# EAGLE board VCPmonitor (EAGLE 5.12)
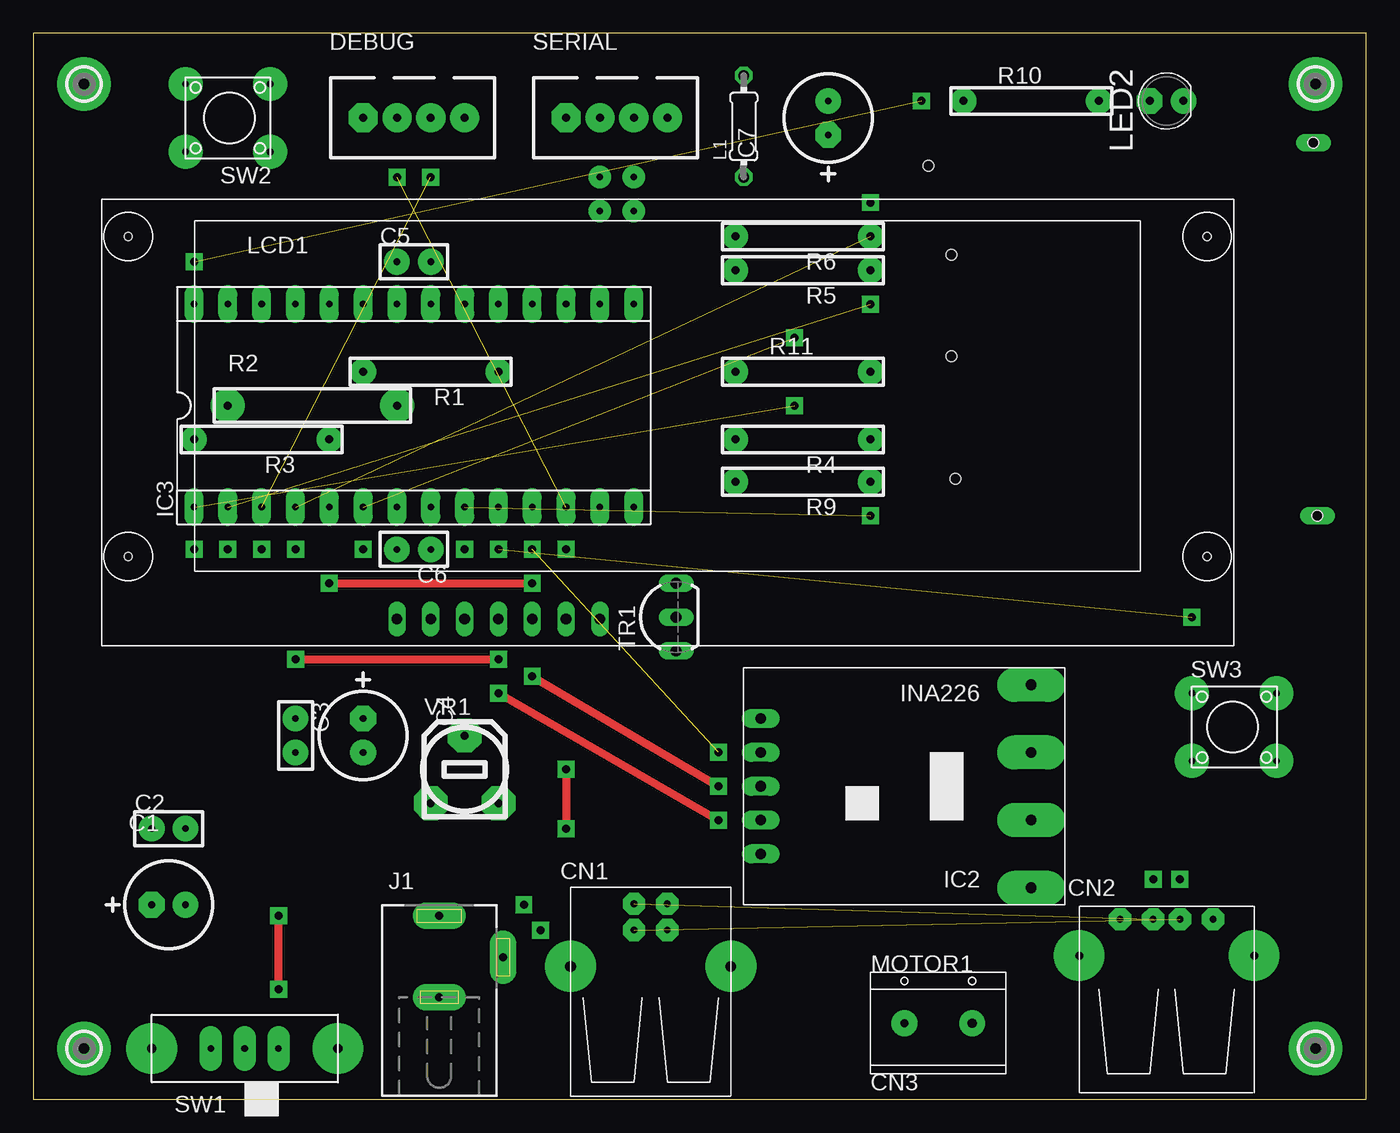
[diagram p0: board, top side]
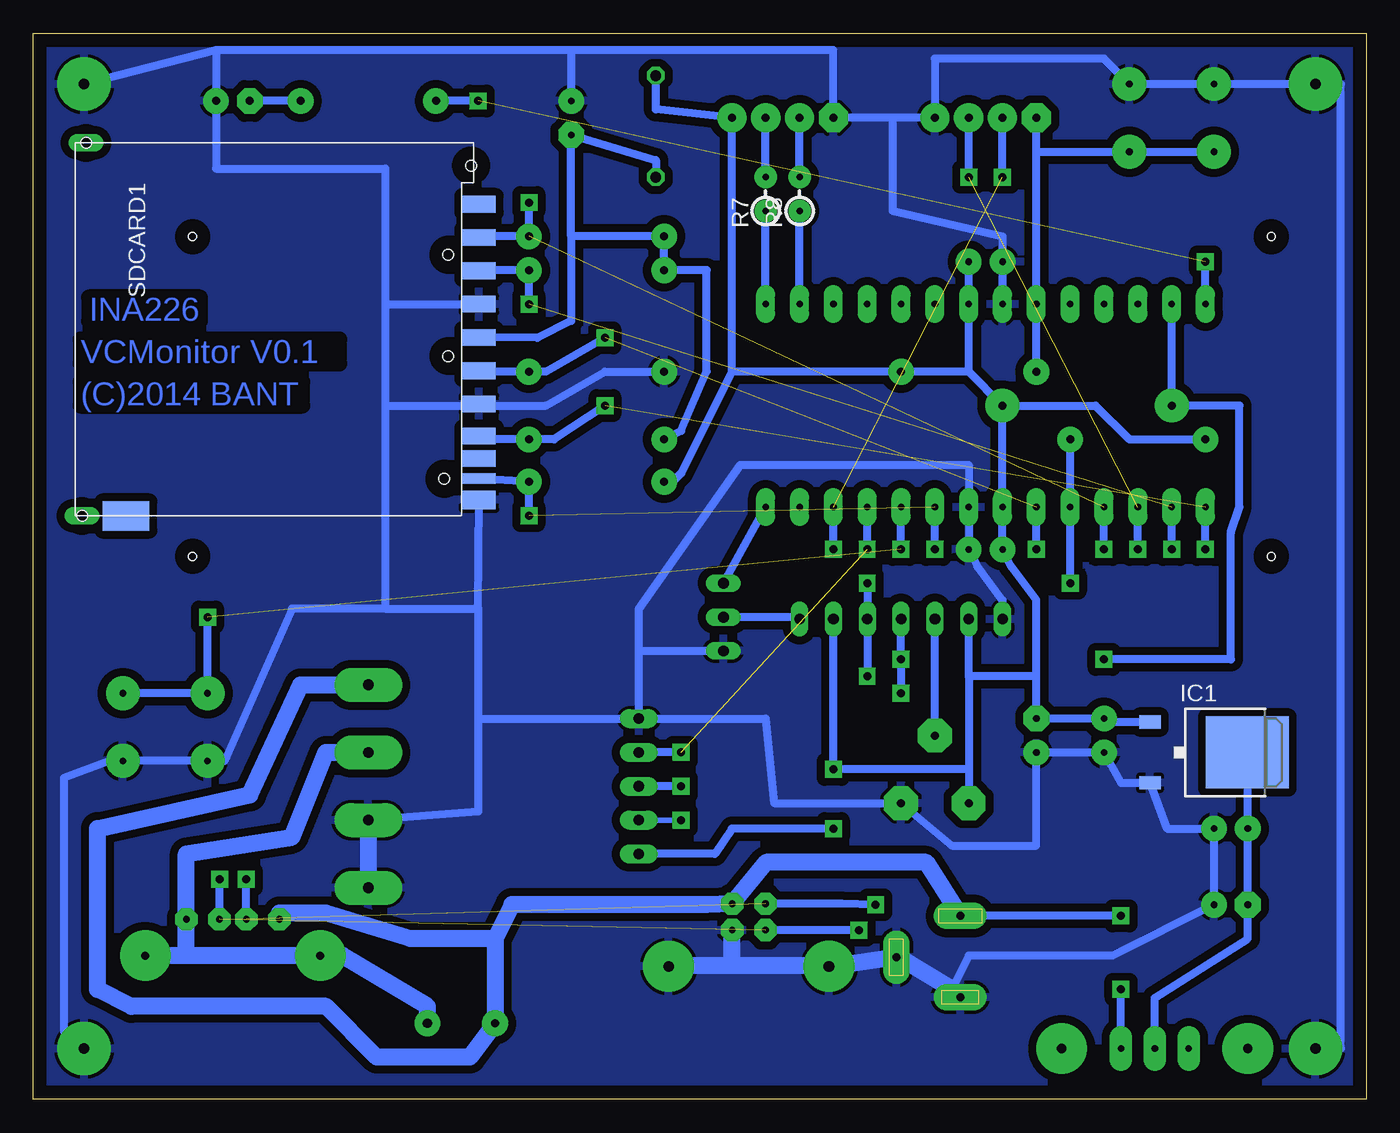
[diagram p1: board, bottom side, seen from below]

Size 100.08 x 80.01 mm. Coordinates in mm from the lower left corner, seen from the top.
Outline: 0,0 100.08,0 100.08,80.01 0,80.01 0,0
Copper layers (1*16): Top 0.035mm / dielectric 1.5mm / Bottom 0.035mm
Design rules "default": minimum track width 10mil, minimum drill 24mil, track to track 8mil, track to pad 8mil, pad to pad 8mil, via to via 8mil, smd to smd 8mil, copper to edge 40mil, drill to drill 8mil, minimum pad ring 10mil, minimum via ring 8mil, stop-mask expansion 4mil, vias tented up to drill 0mil, thermal gap 10mil

## Footprints (pad centres in the part's own frame; a part is rotated, then mirrored left to right if it is on the bottom)
CCAP_6.5 = drill 0.5 pad 1.93 octagon: + -1.27,0 | drill 0.5 pad 1.93 round: - 1.27,0
CAP_DIP_1 = drill 0.5 pad 1.93 round: 1 -1.27,0; 2 1.27,0
USB-B-H = drill 0.5 pad 1.676 octagon: D+ 0,1.25; D- 1.981,1.25; GND 0,-1.25; VBUS 1.981,-1.25 | drill 0.8 pad 3.81 round: F1 -2.718,6.02; F2 -2.718,-6.02
USB-A-H = drill 0.5 pad 1.676 octagon: D+ 2.718,-1.003; D- 2.718,1.003; GND 2.718,-3.493; VBUS 2.718,3.493 | drill 0.6 pad 3.81 round: P$5 0,-6.566; P$6 0,6.566
TERMINAL = drill 0.6 pad 1.93 round: P$1 -2.54,0 | drill 0.7 pad 1.93 round: P$2 2.54,0
CON_HRS_DIP_4 = drill 0.6 pad 2.184 octagon: 1 -3.81,0 | drill 0.6 pad 2.184 round: 2 -1.27,0; 3 1.27,0; 4 3.81,0
TO252 = smd 1 x 1.6: 1 -2.28,-4.8; 2 2.28,-4.8 | smd 5.4 x 6.2: 3 0,2.5
INA226 = drill 0.8 pad 1.422 long: AL 10.16,-2.54; GND 10.16,-5.08; SCL 10.16,2.54; SDA 10.16,0; VS 10.16,5.08 | drill 0.8 pad 2.54 long: ISENSE+ -10.16,-2.54; ISENSE- -10.16,2.54; V+ -10.16,-7.62; V- -10.16,7.62
DIL28 = drill 0.5 pad 1.422 long: 1 -15.24,-7.62; 2 -12.7,-7.62; 3 -10.16,-7.62; 4 -7.62,-7.62; 5 -5.08,-7.62; 6 -2.54,-7.62; 7 0,-7.62; 8 2.54,-7.62; 9 5.08,-7.62; 10 7.62,-7.62; 11 10.16,-7.62; 12 12.7,-7.62; 13 15.24,-7.62; 14 17.78,-7.62; 15 17.78,7.62; 16 15.24,7.62; 17 12.7,7.62; 18 10.16,7.62; 19 7.62,7.62; 20 5.08,7.62; 21 2.54,7.62; 22 0,7.62; 23 -2.54,7.62; 24 -5.08,7.62; 25 -7.62,7.62; 26 -10.16,7.62; 27 -12.7,7.62; 28 -15.24,7.62
DCJ0202 = drill 0.6 pad 2 long: 1 0,6.148; 2 4.8,3.048; 3 0,0.048
0204/7 = drill 0.813 octagon: 1 -3.81,0; 2 3.81,0
ACM1602 = drill 0.8 long: 1 -20.32,-14.75; 2 -17.78,-14.75; 3 -15.24,-14.75; 4 -12.7,-14.75; 5 -10.16,-14.75; 6 -7.62,-14.75; 7 -5.08,-14.75 | hole 0.6: -40.5,13.95; -40.5,-10.05; 40.5,13.95; 40.5,-10.05
LED_3MM_VIRT_2 = drill 0.6 pad 1.93 octagon: A 0,1.27 | drill 0.6 pad 1.93 round: K 0,-1.27
PAD-2.1 = drill 0.8 pad 4 round: B2,1 0,0
R_0.125W_4 = drill 0.6 pad 1.93 round: 1 -5.08,0; 2 5.08,0
R_0.25W_5 = drill 0.6 pad 2.54 round: 1 -6.35,0; 2 6.35,0
R_0.125W_1 = drill 0.5 pad 1.676 round: 1 -1.27,0; 2 1.27,0
DM1B-DSF-PEJ = smd 1.25 x 2.5: 1 -6.9,15.3; 2 -4.4,15.3; 3 -1.9,15.3; 4 0.6,15.3; 5 3.1,15.3; 6 5.6,15.3; 7 8,15.3; 8 9.7,15.3; 9 -9.4,15.3 | smd 1.4 x 2.5: COM 12.8,15.3 | smd 0.8 x 2.5: DET 11.2,15.3 | drill 0.8 pad 1.2 long: P$17 14,-14.5 | drill 0.8 pad 1.27 long: P$18 -14,-14.2 | smd 2.2 x 3.5: WP 14,-11.2 | hole 0.8: -12.3,14.7; -5.6,13; 2,13; 11.2,12.7; -14,-14.2; 14,-14.5
DS-3-SIDE = drill 0.5 pad 1.676 long: 1 0,-2.54; 2 0,0; 3 0,2.54 | drill 0.7 pad 3.81 round: P$1 0,6.985; P$2 0,-6.985
B3F-10X = drill 0.5 pad 2.54 round: 1 -1.27,2.54; 2 5.08,2.54; 3 -1.27,-2.54; 4 5.08,-2.54
TO92 = drill 0.813 long: B 2.54,0; C 0,0; E -2.54,0
POT_MIDDLE = drill 0.6 pad 2.54 octagon: A -2.54,-2.54; E 2.54,-2.54; S 0,2.54

## Placement (x,y rotation side)
C1  4.7uF  [CCAP_6.5]  10.16,14.61 0 top
C2  0.1uF  [CAP_DIP_1]  10.16,20.32 0 top
C3  0.1uF  [CAP_DIP_1]  19.68,27.3 270 top
C4  4.7uF  [CCAP_6.5]  24.77,27.3 270 top
C5  0.1u  [CAP_DIP_1]  28.57,62.87 0 top
C6  0.1u  [CAP_DIP_1]  28.57,41.27 180 top
C7  4.7u  [CCAP_6.5]  59.69,73.66 90 top
CN1  USB-B-H(IN)  [USB-B-H]  46.35,12.7 90 top
CN2  USB-A-H(OUT)  [USB-A-H]  85.09,10.79 90 top
CN3  MOTOR1  [TERMINAL]  67.94,5.71 0 top
DEBUG  [CON_HRS_DIP_4]  28.57,73.66 0 top
IC1  NJU7223DL1-33  [TO252]  11.43,26.04 270 bottom
IC2  INA226  [INA226]  64.77,23.5 180 top
IC3  LPC1114FN28  [DIL28]  27.3,52.07 0 top
J1  DC_JACK  [DCJ0202]  30.48,7.62 0 top
L1  10uH  [0204/7]  53.34,73.03 90 top
LCD1  AE-ACM1602  [ACM1602]  47.62,50.8 0 top
LED2  LED  [LED_3MM_VIRT_2]  85.09,74.93 90 top
MT1  MOUNT-PAD2.1  [PAD-2.1]  96.27,3.81 0 top
MT2  MOUNT-PAD2.1  [PAD-2.1]  3.81,3.81 0 top
MT3  MOUNT-PAD2.1  [PAD-2.1]  96.27,76.2 0 top
MT4  MOUNT-PAD2.1  [PAD-2.1]  3.81,76.2 90 top
R1  10K  [R_0.125W_4]  29.84,54.61 180 top
R2  4.7K  [R_0.25W_5]  20.95,52.07 0 top
R3  4.7K  [R_0.125W_4]  17.14,49.53 180 top
R4  47K  [R_0.125W_4]  57.78,49.53 180 top
R5  47K  [R_0.125W_4]  57.78,62.23 180 top
R6  47K  [R_0.125W_4]  57.78,64.77 180 top
R7  1K  [R_0.125W_1]  45.09,67.94 90 bottom
R8  1K  [R_0.125W_1]  42.55,67.94 90 bottom
R9  1M  [R_0.125W_4]  57.78,46.35 180 top
R10  1K  [R_0.125W_4]  74.93,74.93 0 top
R11  47K  [R_0.125W_4]  57.78,54.61 0 top
SDCARD1  DM1B-DSF-PEJ  [DM1B-DSF-PEJ]  81.92,57.78 270 bottom
SERIAL  [CON_HRS_DIP_4]  43.81,73.66 0 top
SW1  SLIDESW-3  [DS-3-SIDE]  15.88,3.81 90 top
SW2  TACT-SW  [B3F-10X]  16.51,73.66 180 top
SW3  TACT-SW  [B3F-10X]  88.27,27.94 0 top
TR1  DTC124ES  [TO92]  48.26,36.2 90 top
VR1  10K  [POT_MIDDLE]  32.38,24.77 0 top

## Library data of the parts
C1-C7 DEBUG J1 LED2 MT1-MT4 R1-R11 SERIAL SW1-SW3 VR1 = MyLib
CN1 CN2 = con-usb2
CN3 IC1 IC3 TR1 = bant
IC2 = bant2
L1 = rcl
LCD1 = akizuki
SDCARD1 = sd-card

## Nets
3.3V: C3.1 C4.+ C5.2 C6.2 IC1.1 IC2.VS IC3.7 IC3.21 L1.2 LCD1.2 LCD1.6 R1.1 R2.2 R3.2 R9.2 SERIAL.4 VR1.A
DP1(MISO): IC3.1 R4.1 SDCARD1.7
DP2(MOSI): IC3.2 R5.1 SDCARD1.2
DP4(!CS): IC3.4 R6.1 SDCARD1.1
DP5(SDA): IC2.SDA IC3.5 LCD1.5 R3.1
DP6(SCK): IC3.6 R11.2 SDCARD1.5
DP9(DETECT): IC3.9 R9.1 SDCARD1.DET
DP10(SW): IC3.10 SW3.1 SW3.2
DP11(AL): IC2.AL IC3.11
DP13: IC3.13
DP14(LED1): IC3.14 TR1.B
DP15(RX): IC3.15 R7.1
DP16(TX): IC3.16 R8.1
DP17: IC3.17
DP18: IC3.18
DP23(!RESET): DEBUG.1 IC3.23 R1.2 SW2.1 SW2.2
DP24(ISP): IC3.24
DP25: IC3.25
DP26: IC3.26
DP27(SCL): IC2.SCL IC3.27 LCD1.4 R2.1
DP28(LED2): IC3.28 R10.1
GND: C1.- C2.2 C3.2 C4.- C5.1 C6.1 C7.- CN1.F1 CN1.F2 CN1.GND DEBUG.4 IC1.2 IC2.GND IC2.ISENSE- IC2.V- IC3.8 IC3.22 J1.2 J1.3 LCD1.1 LED2.K MT1.B2,1 MT2.B2,1 MT3.B2,1 MT4.B2,1 R11.1 SDCARD1.3 SDCARD1.6 SDCARD1.COM SERIAL.1 SW2.3 SW2.4 SW3.3 SW3.4 TR1.E VR1.E
N$1: C1.+ C2.1 IC1.3 SW1.2
N$2: R7.2 SERIAL.3
N$4: LED2.A R10.2
N$5: R8.2 SERIAL.2
N$6: C7.+ L1.1 R4.2 R5.2 R6.2 SDCARD1.4
N$7: LCD1.3 VR1.S
N$8: CN1.D- CN2.D-
N$9: CN1.D+ CN2.D+
N$10: LCD1.7 TR1.C
SWCLK: DEBUG.3 IC3.3
SWDIO: DEBUG.2 IC3.12
VDD: CN1.VBUS CN2.VBUS CN3.P$1 IC2.V+ J1.1 SW1.1
VSS: CN2.GND CN2.P$5 CN2.P$6 CN3.P$2 IC2.ISENSE+
XTALIN: IC3.20
XTALOUT: IC3.19

## Tracks (layer width: path | path; a pad name or v marks a point on that pad's centre or on a via)
3.3V  (via drill 0.6 pad 1.27)
  Top 0.61: v40.01,24.77 v40.01,20.32
  Bottom 0.254: IC1.1 16.51,27.94
  Bottom 0.61: IC1.1 19.68,28.32 C3.1 C4.+ 24.77,31.75 | C5.2 IC3.21 29.84,54.61 | R3.2 17.78,49.53 20.32,52.07 R2.2 | 29.84,54.61 R1.1 47.62,54.61 | R2.2 29.84,54.61 | 47.62,54.61 51.44,46.99 52.07,46.35 R9.2 | 47.62,54.61 SERIAL.4 53.34,74.3 L1.2 | R2.2 IC3.7 C6.2 26.67,40.01 24.77,37.47 24.77,31.75 | 29.84,24.77 v40.01,24.77 LCD1.6 | 29.84,31.75 29.84,24.77 | 29.84,31.75 LCD1.2 | v40.01,20.32 47.62,20.32 48.9,18.41 IC2.VS | 29.84,24.77 VR1.A | 24.77,31.75 29.84,31.75
DP1(MISO)  (via drill 0.6 pad 1.27)  (1 unrouted)
  Bottom 0.61: SDCARD1.7 66.04,49.53 R4.1 60.96,49.53 v57.15,52.07 | v12.06,41.27 IC3.1
DP2(MOSI)  (via drill 0.6 pad 1.27)  (1 unrouted)
  Bottom 0.61: SDCARD1.2 66.04,62.23 R5.1 v62.87,59.69 | v14.61,41.27 IC3.2
DP4(!CS)  (via drill 0.6 pad 1.27)  (1 unrouted)
  Bottom 0.61: SDCARD1.1 66.04,64.77 R6.1 v62.87,67.31 | v19.68,41.27 IC3.4
DP5(SDA)  (via drill 0.6 pad 1.27)
  Top 0.61: v22.23,38.73 v37.47,38.73 | v37.47,31.75 v51.44,23.5
  Bottom 0.61: R3.1 IC3.5 v22.23,38.73 | v51.44,23.5 IC2.SDA | v37.47,31.75 LCD1.5 v37.47,38.73
DP6(SCK)  (via drill 0.6 pad 1.27)  (1 unrouted)
  Bottom 0.254: 66.67,54.61 SDCARD1.5
  Bottom 0.61: 66.67,54.61 R11.2 61.59,54.61 v57.15,57.15 | v24.77,41.27 IC3.6
DP9(DETECT)  (via drill 0.6 pad 1.27)  (1 unrouted)
  Bottom 0.61: SDCARD1.DET R9.1 v62.87,43.81 | v32.38,41.27 IC3.9
DP10(SW)  (via drill 0.6 pad 1.27)  (1 unrouted)
  Bottom 0.61: SW3.2 SW3.1 87,31.11 v87,36.2 | v34.92,41.27 IC3.10
DP11(AL)  (via drill 0.6 pad 1.27)  (1 unrouted)
  Bottom 0.61: v51.44,26.04 IC2.AL | v37.47,41.27 IC3.11
DP14(LED1)
  Bottom 0.61: TR1.B IC3.14
DP15(RX)
  Bottom 0.61: IC3.15 R7.1
DP16(TX)
  Bottom 0.61: IC3.16 R8.1
DP23(!RESET)
  Bottom 0.61: R1.2 IC3.23 24.77,71.12 | SW2.2 SW2.1 24.77,71.12 | 24.77,71.12 DEBUG.1
DP27(SCL)  (via drill 0.6 pad 1.27)
  Top 0.61: v19.68,33.02 v34.92,33.02 | v34.92,30.48 v51.44,20.95
  Bottom 0.406: v51.44,20.95 IC2.SCL
  Bottom 0.61: IC3.27 R2.1 9.53,52.07 9.53,44.45 10.16,42.55 10.16,33.02 v19.68,33.02 | LCD1.4 v34.92,33.02 v34.92,30.48
DP28(LED2)  (via drill 0.6 pad 1.27)  (1 unrouted)
  Bottom 0.61: IC3.28 v12.06,62.87 | v66.67,74.93 R10.1
GND
  Bottom 0.254: J1.3 31.75,7.62 | 67.31,52.07 SDCARD1.6
  Bottom 0.61: 31.11,8.26 29.84,10.79 19.05,10.79 C1.- C2.2 14.96,20.32 IC1.2 18.41,23.75 C3.2 C4.- 24.77,19.05 31.11,19.05 VR1.E 44.45,22.23 45.09,28.57 IC2.GND | MT4.B2,1 3.81,74.93 | IC3.22 C5.1 27.3,64.77 35.56,66.67 35.56,73.66 | 35.56,73.66 SERIAL.1 40.01,78.74 59.69,78.74 | 35.56,73.66 DEBUG.4 32.38,78.11 19.68,78.11 SW2.3 SW2.4 MT4.B2,1 | 66.61,52.07 61.59,52.07 57.15,54.61 R11.1 | 66.67,36.83 SDCARD1.COM 66.67,44.98 | 54.61,33.66 54.61,36.83 46.99,47.62 29.84,47.62 IC3.8 C6.1 29.21,40.01 27.3,37.47 LCD1.1 | 54.61,33.66 TR1.E | MT4.B2,1 3.17,76.2 | 59.69,78.74 86.36,78.74 | 86.36,78.74 LED2.K | 59.69,78.74 C7.- | IC2.GND 54.61,33.66 | MT2.B2,1 1.91,3.81 1.91,76.2 MT4.B2,1 | 86.36,78.74 MT3.B2,1 | MT1.B2,1 97.79,5.08 97.79,24.13 94.36,25.4 SW3.4 SW3.3 85.72,25.4 80.64,36.83 73.66,36.83 | 66.67,36.83 66.67,28.57 | 66.67,28.57 IC2.GND | IC2.ISENSE- 66.67,21.59 66.67,28.57 | 73.66,59.69 SDCARD1.3 | 73.66,59.69 73.66,52.07 | 73.66,52.07 67.31,52.07 66.61,52.07 | SDCARD1.6 66.61,52.07 | 73.66,36.83 66.67,36.83 | 73.66,52.07 73.66,36.83 | LED2.K 87,74.93 | LED2.K 86.36,69.85 73.66,69.85 73.66,59.69
  Bottom 1.27: J1.3 31.11,8.26 35.28,10.79 J1.2 39.7,10.03 | 39.7,10.03 CN1.F1 | 39.7,10.03 47.62,10.03 | 47.62,10.03 51.74,10.03 CN1.F2 | CN1.GND 47.62,12.7 47.62,10.03 | IC2.ISENSE- IC2.V-
  pour Bottom (isolate 0.61): 0,80.01 0,0 100.33,0 100.33,80.01
N$1
  Bottom 0.61: 8.89,26.04 C2.1 C1.+ 8.89,12.06 15.88,7.62 SW1.2
  Bottom 1.27: 8.89,26.04 IC1.3
N$2
  Bottom 0.61: R7.2 SERIAL.3
N$4
  Bottom 0.61: R10.2 LED2.A
N$5
  Bottom 0.61: R8.2 SERIAL.2
N$6
  Bottom 0.61: SDCARD1.4 62.23,57.15 59.69,58.42 59.69,64.77 | 59.69,64.77 C7.+ 53.34,70.48 L1.1 | 59.69,64.77 R6.2 R5.2 49.53,62.23 49.53,54.61 51.44,50.16 R4.2
N$7
  Bottom 0.61: VR1.S LCD1.3
N$8  (via drill 0.6 pad 1.27)  (1 unrouted)
  Bottom 0.61: CN2.D- v84.09,16.51 | CN1.D- 39.37,14.68 v36.83,14.61
N$9  (via drill 0.6 pad 1.27)  (1 unrouted)
  Bottom 0.61: v38.1,12.7 CN1.D+ | CN2.D+ v86.09,16.51
N$10
  Bottom 0.61: TR1.C 42.55,36.2 LCD1.7
SWCLK  (via drill 0.6 pad 1.27)  (1 unrouted)
  Bottom 0.61: v29.84,69.22 DEBUG.3 | v17.14,41.27 IC3.3
SWDIO  (via drill 0.6 pad 1.27)  (1 unrouted)
  Bottom 0.61: v27.3,69.22 DEBUG.2 | v40.01,41.27 IC3.12
VDD  (via drill 0.6 pad 1.27)
  Top 0.61: v18.41,8.26 v18.41,13.77
  Bottom 0.406: 81.6,13.97 CN2.VBUS
  Bottom 0.61: v18.41,13.77 J1.1 | SW1.1 v18.41,8.26
  Bottom 1.27: J1.1 33.02,17.78 45.06,17.78 CN1.VBUS 49.51,14.61 64.14,14.61 65.41,12.06 | 65.41,12.06 CN3.P$1 67.31,3.17 74.3,3.17 78.11,6.99 92.71,6.99 95.25,8.26 95.25,20.32 83.82,22.86 80.01,31.11 IC2.V+ | 65.41,12.06 71.75,12.06 78.11,13.97 81.6,13.97
VSS
  Bottom 0.61: 87.63,10.79 88.58,10.97
  Bottom 1.27: IC2.ISENSE+ 78.11,26.04 80.64,19.68 88.58,18.41 CN2.GND 88.58,10.97 | CN3.P$2 70.48,6.99 76.83,10.79 CN2.P$6 87.63,10.79 CN2.P$5

## Text on the board
Bottom: INA226 | VCMonitor V0.1 | (C)2014 BANT